# Allegro board ex2_rlc.brd
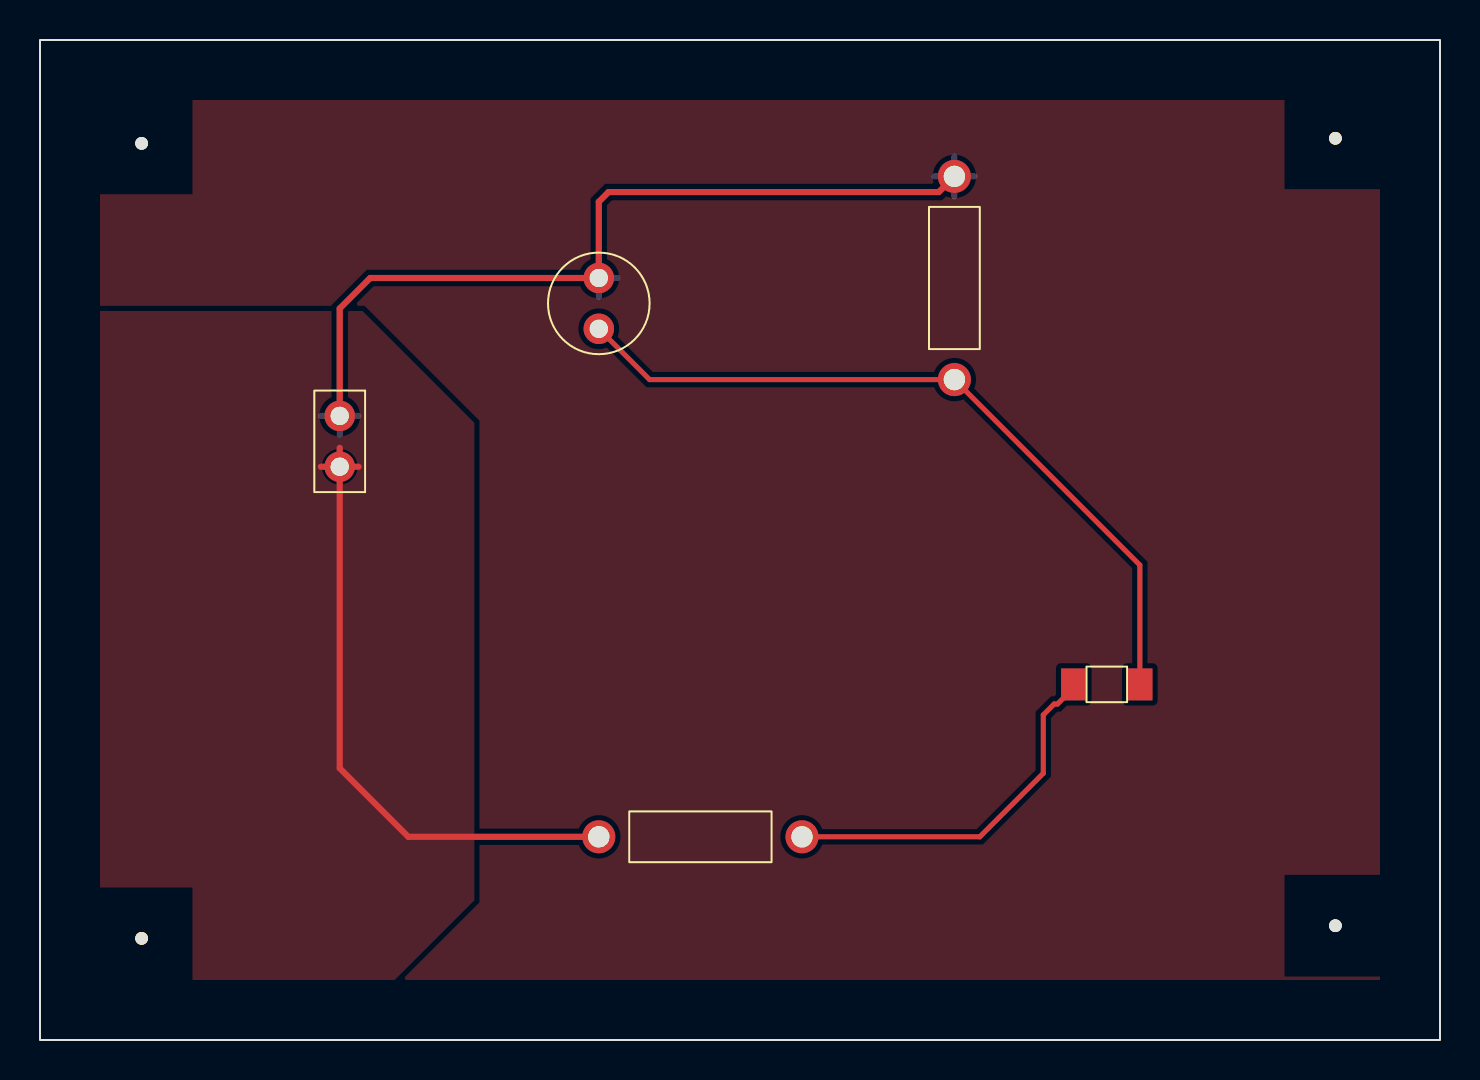
[diagram p0: board, top side]
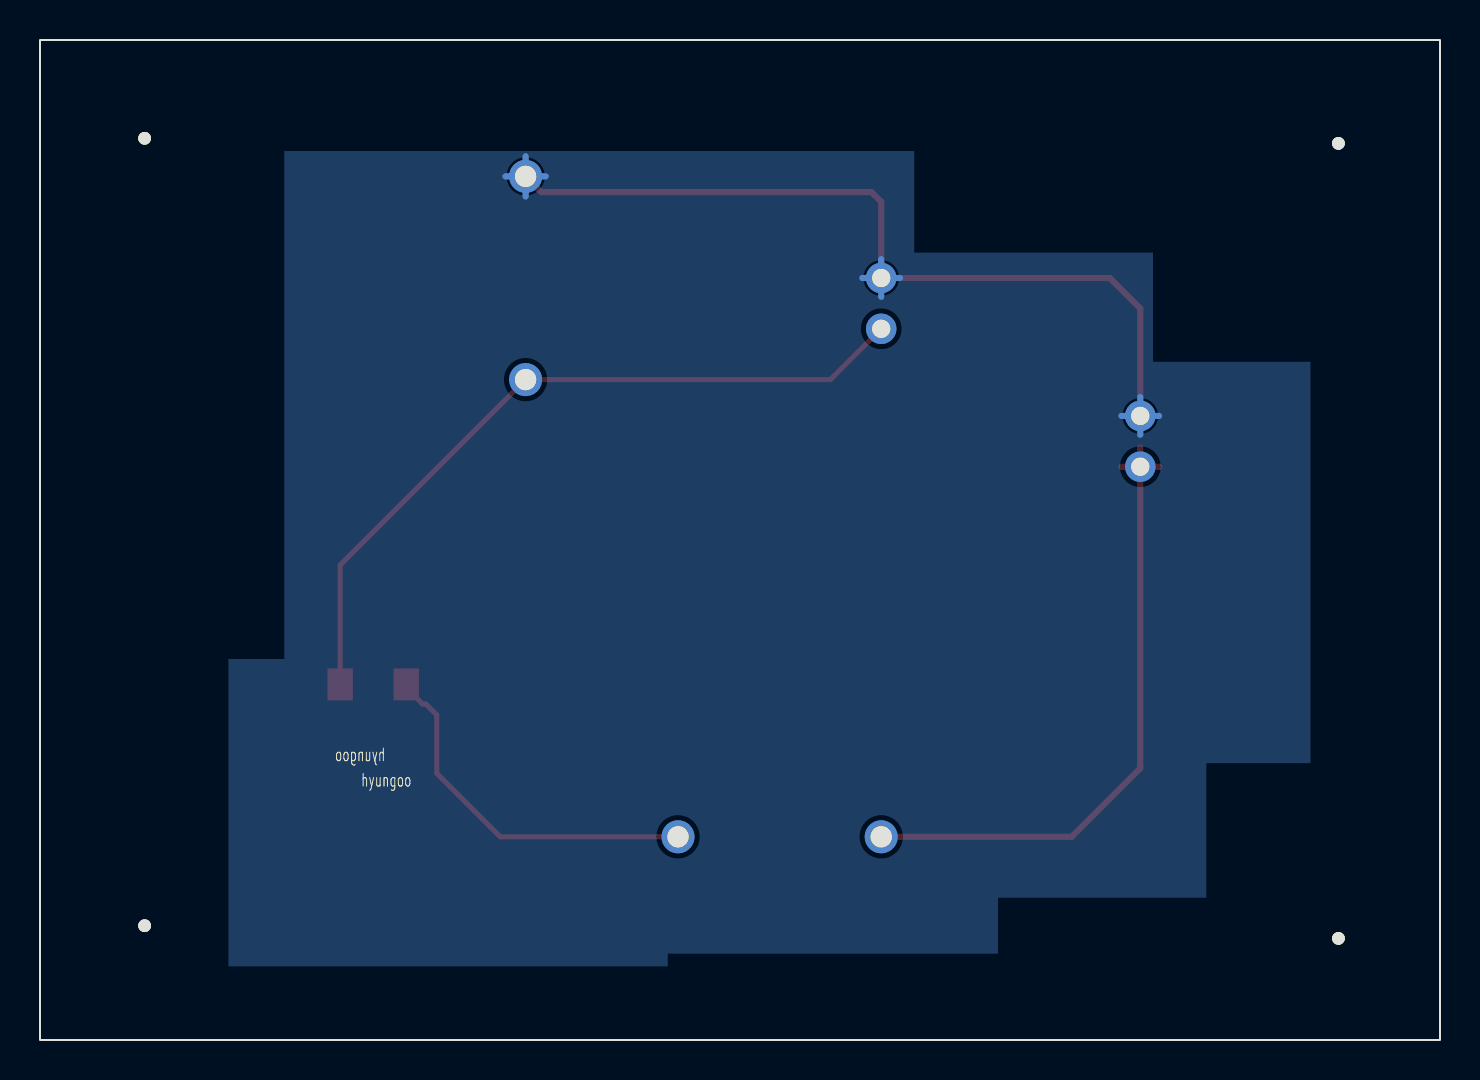
[diagram p1: board, bottom side, seen from below]

Outline 70 x 50 mm; copper layers: TOP, BOTTOM. Coordinates in mm from the lower left corner of the outline.
Outline path: rectangle 0,0 70,50

## Design rules (mm)
constraint set DEFAULT: min track width 0.254, pair gap 0.254

## Placement (name value [footprint] x y rotation side)
C1  1u  [CAP196]  27.94 35.56 0 top
J1  CON2  [JUMPER2]  14.99 28.66 90 top
L1  100n  [SMDRES]  53.34 17.78 0 top
NOREF  -  [unnamed]  64.77 45.09 0 top
NOREF#2  -  [unnamed]  5.08 5.08 0 top
NOREF#3  -  [unnamed]  64.77 5.71 0 top
NOREF#4  -  [unnamed]  5.08 44.83 0 top
R1  330  [RES400]  27.94 10.16 270 top
R2  330  [RES400]  45.72 33.02 0 top

## Library data of the parts
C1 = CAP NP: Tolerance: ***; User Part Number: ***
J1 = CON2: User Part Number: ***
L1 = INDUCTOR: Tolerance: ***; User Part Number: ***
R1 R2 = R: Tolerance: ***; User Part Number: ***

## Footprints (pads in the part's own frame, mm; a bottom-side part is the same pattern mirrored in y, then rotated)
CAP196
  round 1.524 hole 0.914: 1(0,0) 2(0,2.54)
JUMPER2
  round 1.524 hole 0.914: 1(0,0) 2(2.54,0)
RES400
  round 1.651 hole 1.067: 1(0,0) 2(0,10.16)
SMDRES
  rect 1.27x1.6 smd: 1(-1.651,0) 2(1.651,0)
unnamed
  round 0.635 hole 3.175 unplated: (0,0)

## Nets
GND: C1.2 J1.2 R2.2
VCC: J1.1 R1.1
KKK: L1.1 R1.2
N00232: C1.1 L1.2 R2.1

## Routing (per net, layer and track width the routed paths; a pad name or vN(x,y) marks a point on that pad's centre or on a via; arc(x,y) is an arc through that point)
GND: length 52.6
  TOP w0.308: J1.2 14.99,36.58 16.51,38.1 C1.2 27.94,41.91 28.43,42.4 44.94,42.4 R2.2
  BOTTOM w0.308: J1.2 15.93,31.2 ; J1.2 14.99,32.15 ; J1.2 14.04,31.2 ; J1.2 14.99,30.26 ; 27,38.1 C1.2 ; C1.2 27.94,39.04 ; C1.2 27.94,37.16 ; C1.2 28.88,38.1 ; R2.2 45.72,44.19 ; R2.2 44.71,43.18 ; R2.2 45.72,42.17 ; R2.2 46.73,43.18
VCC: length 32.3
  TOP w0.308: J1.1 14.99,13.59 18.41,10.16 R1.1 ; J1.1 14.99,29.61 ; J1.1 15.93,28.66 ; J1.1 14.04,28.66
KKK: length 18.6
  TOP w0.254: L1.1 51.69,17.61 50.87,16.8 50.71,16.8 50.16,16.26 50.16,13.34 46.99,10.16 R1.2
N00232: length 37.9
  TOP w0.254: C1.1 30.48,33.02 R2.1 54.99,23.75 L1.2

## Copper pours and planes (outline as drawn; the poured copper is in the pictures)
GND on BOTTOM: 26.29,44.45 57.78,44.45 57.78,19.05 60.58,19.05 60.58,3.68 38.61,3.68 38.61,4.32 22.1,4.32 22.1,7.11 11.68,7.11 11.68,13.84 6.48,13.84 6.48,33.91 14.35,33.91 14.35,39.37 26.29,39.37
VCC on TOP: 3,36.45 16.13,36.45 21.72,30.86 21.72,6.99 17.73,3 3,3
Net_1 on TOP: 3,3 3,47 67,47 67,3

## Text on the board
Ref Des/Silkscreen Bottom: hyungoo
USER_PART_NUM_TOP: FIGURE | FINISHED_SIZE | 0.914 | 1.067 | 3.175 | DRILL CHART: TOP to BOTTOM | ALL UNITS ARE IN MILLIMETERS | PLATED | NON-PLATED | QTY | 4
